# Allegro board SDI-12_HUMIDITY_ SENSOR_SCH_REVA_20190406.brd
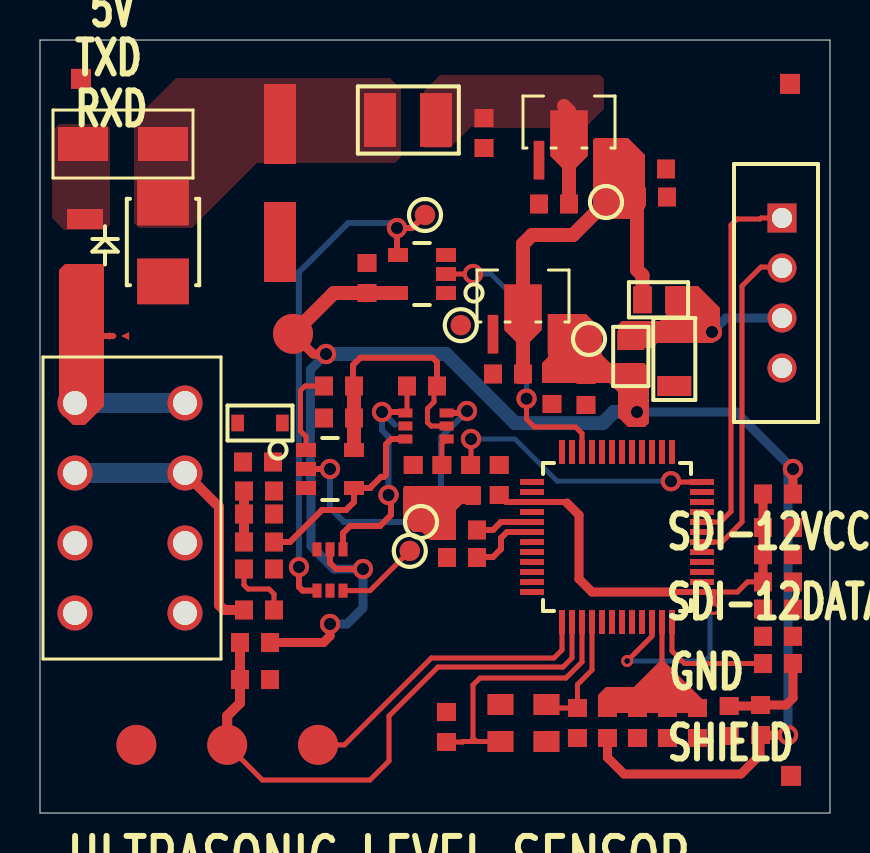
[diagram p0: board, top side]
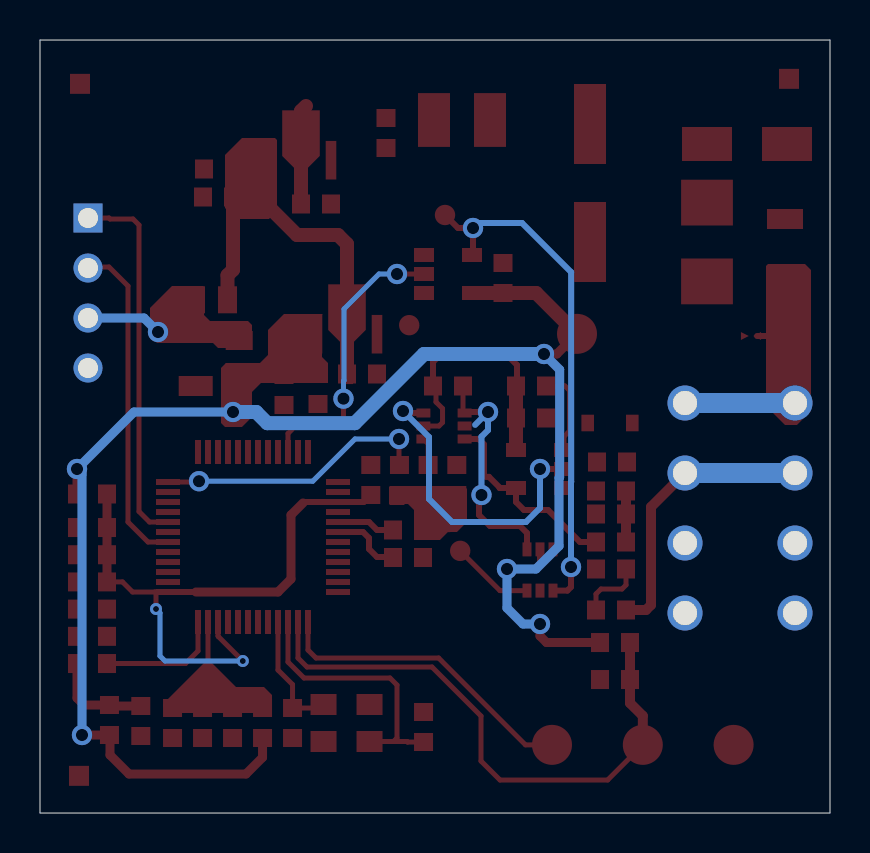
[diagram p1: board, bottom side, seen from below]

Outline 39.5 x 38.65 mm; copper layers: TOP, BOTTOM. Coordinates in mm from the lower left corner of the outline.
Outline path: 0,38.65 0,0 39.5,0 39.5,38.65 0,38.65

## Design rules (mm)
net group POWER: nets VCC_3V3

## Placement (name value [footprint] x y rotation side)
C1  0.1uF  [CC0603]  22.96 16.65 90 top
C2  0.1uF  [CC0603]  10.75 6.67 0 top
C3  9.0pF  [CC0603]  20.32 4.3 270 top
C4  9.0pF  [CC0603]  26.87 4.5 90 top
C5  1uF  [CC0603]  36.9 14.27 0 top
C6  0.1uF  [CC0603]  36.9 12.91 0 top
C7  1nF  [CC0603]  36.9 11.55 0 top
C8  1uF  [CC0603]  31.37 4.5 90 top
C9  10uF  [CC0603]  29.87 4.5 270 top
C10  0.1uF  [CC0603]  32.87 4.5 270 top
C11  1uF  [CC0603]  34.46 4.6 90 top
C12  10uF  [CC0603]  36.9 10.19 0 top
C13  0.1uF  [CC0603]  36.9 8.83 0 top
C14  10UF/50V  [CAPAE630W660H570]  12 31.5 270 top
C15  1uF/50V  [CC0603]  25.7 30.45 180 top
C16  0.1uF  [CC0603]  22.2 34 270 top
C17  10uF  [CC0603]  30.6 30.8 0 top
C18  0.1uF  [CC0603]  30.55 32.2 0 top
C19  1uF  [CC0603]  23.4 21.95 180 top
C20  10uF  [CC0603]  27.3 21.15 270 top
C21  0.1uF  [CC0603]  25.6 21.2 270 top
C22  0.1uF  [CC0603]  16.35 26.75 90 top
C23  0.1uF  [CC0603]  14.95 19.75 180 top
C24  3.3nF  [CC0603]  10.95 16.1 180 top
C25  100uF  [CAPT1206]  31.71 22.7 270 top
CON1  B4B-EH(LF)(SN)  [CON_B4B-EH-A]  36.8 26 270 top
CON2  1825660000  [LSF-SMT_8L]  5.25 15.25 270 top
D1  B350A-13-F  [DO-214AC]  4.15 33.45 0 top
D2  PDZ7.5B  [DIOSOD323]  11 19.5 0 top
F1  1206L012WR  [FUSER_1206L012WR]  2.25 28.3 90 top
FIDUCIAL1  TP100  [FIDS100XS200]  2.05 36.71 0 top
FIDUCIAL2  TP100  [FIDS100XS200]  37.55 1.86 0 top
FIDUCIAL3  TP100  [FIDS100XS200]  37.5 36.46 0 top
L1  MMZ1608R601A  [INDC0603]  36.9 15.95 0 top
L2  MMZ1608R601A  [INDC0603]  28.37 4.5 270 top
L3  MMZ1608R601A  [INDC0603]  36.03 4.65 270 top
L4  1uH  [INDC1210H87]  18.4 34.65 0 top
NOREF  -  []  -232.85 -203.15 0 top
R1  4.7k  [RC0603]  10.75 8.52 180 top
R2  33R  [RC0603]  36.9 7.47 180 top
R3  330k  [RC0603]  14.95 21.35 0 top
R4  330k  [RC0603]  19.1 21.35 0 top
R5  510R  [RC0603]  10.95 13.55 0 top
R6  68R  [RC0603]  10.95 14.95 180 top
R7  220R  [RC0603]  10.95 12.2 0 top
R8  220R  [RC0603]  10.95 10.15 0 top
R9  200k  [RC0603]  10.9 17.55 180 top
R10  120k  [RC0603]  20.09 16.65 270 top
R11  180k  [RC0603]  18.66 16.65 270 top
R12  DNP_0R  [RC0805]  30.93 25.66 180 top
R13  0R  [RC0805]  29.54 22.82 270 top
R14  0R  [RC0603]  21.1 12.77 180 top
R15  0R  [RC0603]  21.1 14.15 180 top
R16  0R  [RC0603]  21.53 16.65 270 top
TP1  -  [TP100]  18.49 13.11 0 top
TP2  -  [TP100]  19.05 14.55 180 top
TP3  T POINT R  [TP_80C]  12.65 23.96 0 top
TP4  T POINT R  [TP_80C]  13.9 3.41 0 top
TP5  T POINT R  [TP_80C]  4.82 3.41 0 top
TP6  T POINT R  [TP_80C]  9.36 3.41 0 top
TP7  -  [TP100]  28.3 30.55 0 top
TP8  -  [TP100]  27.45 23.7 0 top
TP9  -  [TP100]  21.04 24.39 0 top
TP10  -  [TP100]  19.25 29.9 180 top
U1  STM8L151C6T6  [QFP50P900X900-48]  28.85 13.8 0 top
U2  MCP1703T-5002E/MB  [SOT89]  26.45 34.55 0 top
U3  MCP1703T-3302E/MB  [SOT89]  24.15 25.85 0 top
U4  NC7SZ14M5  [SOT23-5]  19.1 26.95 90 top
U5  74LVC2G07GW  [SOT363-6]  14.5 12.15 90 top
U6  NC7WZ14P6X  [TSSOP65P-6]  19.3 19.35 0 top
U7  NC7SZ125M5  [SOT23-5]  14.5 17.2 270 top
V1  SPARK GAP  [SPARK_GAP]  3.95 23.85 0 top
VR1  SMBJ17A  [DIO_DO214AA_SMB]  6.15 28.55 90 top
Y1  CRYSTAL 16MHZ  [XTAL_CX3225SB16000E0FPZ25]  24.17 4.5 180 top

## Library data of the parts
C1-C13 C15-C24 = CAP
C14 C25 = CAPPOL
CON1 = CON_04
CON2 = CON8_LSF_SMT
D1 = DIODE_AK
D2 = DIO_SCHOTTKY_AK
F1 = FUSE
FIDUCIAL1-FIDUCIAL3 TP1 TP2 TP7-TP10 = TP
L1-L4 = INDUCTOR
R1 = res
R2-R16 = RES
TP3-TP6 = T POINT R
U1 = STM8L151C6T6_34
U2 = MCP1703T
U3 = IC_MCP1703T-3302E/MB
U4 = IC_NC7SZ14M5
U5 = IC_74LVC2G07GW
U6 = IC_NC7WZ14P6X
U7 = IC_NC7SZ125M5
V1 = SPARK GAP
VR1 = ZENER_AK
Y1 = CRYSTAL_old

## Footprints (pads in the part's own frame, mm; a bottom-side part is the same pattern mirrored in y, then rotated)
CAPAE630W660H570
  rect 4x1.6 smd: 1(-2.95,0) 2(2.95,0)
CAPT1206
  rect 1x1.7 smd: 1(-1.35,0) 2(1.35,0)
CC0603
  rect 0.9x0.95 smd: 1(-0.75,0) 2(0.75,0)
CON_B4B-EH-A
  rect 1.45x1.45 hole 1: 1(-3.75,0.3)
  round 1.45 hole 1: 2(-1.25,0.3) 3(1.25,0.3) 4(3.75,0.3)
DIO_DO214AA_SMB
  rect 2.29x2.59 smd: 1(-1.97,0) 2(1.97,0)
DIOSOD323
  rect 0.63x0.83 smd: 1(-1.115,0) 2(1.115,0)
DO-214AC
  rect 2.5x1.7 smd: 1(-2,0) 2(2,0)
FIDS100XS200
  rect 1x1 smd: 1(0,0)
FUSER_1206L012WR
  rect 1x1.8 smd: 1(-1.4,0) 2(1.4,0)
INDC0603
  rect 0.9x0.95 smd: 1(-0.75,0) 2(0.75,0)
INDC1210H87
  rect 1.6x2.69 smd: 1(-1.4,0) 2(1.4,0)
LSF-SMT_8L
  round 1.75 hole 1.2: 1(5.25,2) 2(1.75,2) 3(-1.75,2) 4(-5.25,2) 5(-5.25,-3.5) 6(-1.75,-3.5) 7(1.75,-3.5) 8(5.25,-3.5)
QFP50P900X900-48
  rect 0.3x1.2 smd: 1(-2.75,-4.25) 2(-2.25,-4.25) 3(-1.75,-4.25) 4(-1.25,-4.25) 5(-0.75,-4.25) 6(-0.25,-4.25) 7(0.25,-4.25) 8(0.75,-4.25) 9(1.25,-4.25) 10(1.75,-4.25) 11(2.25,-4.25) 12(2.75,-4.25) 25(2.75,4.25) 26(2.25,4.25) 27(1.75,4.25) 28(1.25,4.25) 29(0.75,4.25) 30(0.25,4.25) 31(-0.25,4.25) 32(-0.75,4.25) 33(-1.25,4.25) 34(-1.75,4.25) 35(-2.25,4.25) 36(-2.75,4.25)
  rect 1.2x0.3 smd: 13(4.25,-2.75) 14(4.25,-2.25) 15(4.25,-1.75) 16(4.25,-1.25) 17(4.25,-0.75) 18(4.25,-0.25) 19(4.25,0.25) 20(4.25,0.75) 21(4.25,1.25) 22(4.25,1.75) 23(4.25,2.25) 24(4.25,2.75) 37(-4.25,2.75) 38(-4.25,2.25) 39(-4.25,1.75) 40(-4.25,1.25) 41(-4.25,0.75) 42(-4.25,0.25) 43(-4.25,-0.25) 44(-4.25,-0.75) 45(-4.25,-1.25) 46(-4.25,-1.75) 47(-4.25,-2.25) 48(-4.25,-2.75)
RC0603
  rect 0.9x0.95 smd: 1(-0.75,0) 2(0.75,0)
RC0805
  rect 0.95x1.35 smd: 1(-0.8,0) 2(0.8,0)
SOT23-5
  rect 0.7x1 smd: 1(-0.95,-1.2) 2(0,-1.2) 3(0.95,-1.2) 4(0.95,1.2) 5(-0.95,1.2)
SOT89
  rect 0.53x1.93 smd: 1(-1.5,-1.91) 3(1.5,-1.91)
  custom 1.88x4.985 smd: 2(0,-1.91)
SOT363-6
  rect 0.7x0.45 smd: 1(-1.03,0.65) 2(-1.03,0) 3(-1.03,-0.65) 4(1.03,-0.65) 5(1.03,0) 6(1.03,0.65)
SPARK_GAP
  custom 0.4x0.4 smd: 1(-0.305,0) 2(0.305,0)
TP100
  round 1.02 smd: 1(0,0)
TP_80C
  round 2 smd: 1(0,0)
TSSOP65P-6
  rect 0.7x0.45 smd: 1(-1.03,0.65) 2(-1.03,0) 3(-1.03,-0.65) 4(1.03,-0.65) 5(1.03,0) 6(1.03,0.65)
XTAL_CX3225SB16000E0FPZ25
  rect 1.3x1.05 smd: 1(-1.15,-0.925) 2(1.15,-0.925) 3(1.15,0.925) 4(-1.15,0.925)

## Nets
GND: C1.2 C2.2 C3.1 C4.1 C5.2 C6.2 C7.2 C8.1 C9.2 C10.2 C11.1 C12.2 C13.2 C14.2(N) C15.2 C16.2 C17.2 C18.2 C19.2 C20.2 C21.2 C22.2 C23.2 C24.1 C25.2(N) CON1.4 CON2.1(SHIELD1) CON2.2(GND1) CON2.7(GND2) CON2.8(SHIELD2) D2.2(ANODE) R9.1(2) R11.1(2) TP5.1(TP) TP9.1 U1.9(VSS) U1.40(VSSIO) U2.1(GND) U3.1(GND) U4.3(GND) U5.2(GND) U6.2(GND) U7.3(GND) V1.2 VR1.1(ANODE) Y1.2 Y1.4
VCC_3V3: C20.1 C21.1 C22.1 L1.2 L2.2 L3.2 R1.1(2) R13.2(1) TP3.1(TP) TP8.1 U3.3(VOUT) U4.5(VCC) U5.5(VCC)
VCC_5V: C17.1 C18.1 C19.1 C23.1 R3.2(1) R4.2(1) R12.2(1) TP7.1 U2.3(VOUT) U3.2(VIN_1) U6.5(VCC) U7.5(VCC)
VDD: C1.1 C5.1 C6.1 C7.1 L1.1 U1.10(VDD) U1.13(RES) U1.39(VDDIO)
/SDI_TXD_EN: U1.34(PD5) U4.2(A)
NRESET: C2.1 R1.2(1) TP6.1(TP) U1.2(PA1)
RXD: CON1.1 U1.20(PD0)
SDI_RXD: R10.2(1) R11.2(1) R15.2(1) R16.2(1) TP2.1
SDI_TXD: R14.2(1) TP1.1 U5.3(2A)
SWIM: TP4.1(TP) U1.1(PA0)
TXD: CON1.2 U1.18(PE4)
V_IN_12V: CON2.4(POWER1) CON2.5(POWER2) F1.1 V1.1
N18460657: C12.1 C13.1 R2.2(1) U1.12(VREF)
N18460681: C8.2 C9.1 C10.1 L2.1 U1.11(VDDA)
N18460696: C3.2 U1.3(PA2) Y1.3
N18460698: C4.2 U1.4(PA3) Y1.1
N18460743: C11.2 L3.1 R2.1(2)
N18464009: CON2.3(DATA1) CON2.6(DATA2) R8.1(2)
N18466602: C25.1(P) CON1.3 R12.1(2) R13.1(2)
N18468051: R14.1(2) U1.42(PC3)
N18468081: R15.1(2) U1.41(PC2)
N18468199: R16.1(2) U1.24(PB0)
N19333552: R7.1(2) R8.2(1)
N19333554: R6.1(2) R7.2(1)
N19333556: C24.2 D2.1(CATHODE) R5.1(2) R6.2(1) R9.2(1)
N19333579: R10.1(2) U6.4(/Y2)
N19333581: R5.2(1) U6.3(A2) U7.4(Y)
N19333595: TP10.1 U4.4(/Y) U5.1(1A)
N19334013: R3.1(2) U5.6(1Y) U7.1(NOE)
N19334015: R4.1(2) U5.4(2Y) U6.1(A1)
N19334077: U6.6(/Y1) U7.2(A)
N19334098: C15.1 C16.1 L4.2 U2.2(VIN_1)
N19334148: D1.1(A) F1.2
N19334157: C14.1(P) D1.2(K) L4.1 VR1.2(CATHODE)

Pads without a net: FIDUCIAL1 1; FIDUCIAL2 1; FIDUCIAL3 1; U1 5 6 7 8 14 15 16 17 19 21 22 23 25 26 27 28 29 30 31 32 33 35 36 37 38 43 44 45 46 47 48; U4 1

## Via types
v1: diameter 1.016, hole 0.61, TOP to BOTTOM, 17 vias
v2: diameter 0.6, hole 0.3, TOP to BOTTOM, 2 vias

## Routing (per net, layer and track width the routed paths; a pad name or vN(x,y) marks a point on that pad's centre or on a via; arc(x,y) is an arc through that point)
VCC_3V3: length 86
  TOP w0.3: v1(16.15,12.2) 14.8,12.2 14.5,12.5 U5.5
  TOP w0.45: v1(29.85,20.05) 29.54,20.36 R13.2 ; R1.1 14.17,8.52 14.5,8.85 v1(14.5,9.45) ; L2.2 28.37,2.77 29.2,1.95 35.05,1.95 36,2.9 36,3.87 L3.2 v1(37.4,3.9) ; TP3.1 13.66,22.95 v1(14.3,22.95) ; v1(37.65,17.2) L1.2
  TOP w0.7: U4.5 C22.1 14.69,26 TP3.1
  BOTTOM w0.45: v1(29.85,20.05) 34.8,20.05 v1(37.65,17.2) 37.4,16.95 v1(37.4,3.9) ; v1(14.5,9.45) 15.35,9.45 16.15,10.25 v1(16.15,12.2) 14.7,12.2 13.55,13.35 13.55,16.76 13.52,16.79 13.52,22.17 v1(14.3,22.95)
  BOTTOM w0.7: v1(14.3,22.95) 20.3,22.95 23.76,19.49 28.13,19.49 28.69,20.05 v1(29.85,20.05)
VCC_5V: length 29.7
  TOP w0.25: U6.5 19.55,19.35 19.37,19.53 19.37,20.22 19.7,20.55 19.7,21.2 R4.2
  TOP w0.3: R4.2 19.85,22.55 19.64,22.76 16.01,22.76 15.65,22.4 15.65,21.4 R3.2
  TOP w0.7: R12.2 30.13,26.89 29.85,27.16 C17.1 ; R3.2 C23.1 U7.5 ; TP7.1 26.65,28.9 24.6,28.9 24.15,28.45 U3.2 C19.1
VDD: length 31.7
  TOP w0.25: v2(29.36,7.6) 30.57,8.82 30.57,8.82 30.6,8.85 U1.10 ; C7.1 35.38,11.55 34.87,11.05 33.75,11.05 ; 33.1,11.05 U1.13 33.75,11.05 ; 33.75,11.05 33.7,11 v2(33.7,10.2)
  TOP w0.3: U1.13 31.7,11.05 ; C1.1 23.31,15.55 U1.39 26.3,15.55 26.35,15.5
  TOP w0.45: 31.7,11.05 27.6,11.05 26.95,11.7 26.95,14.9 26.35,15.5 ; L1.1 C5.1 C6.1 C7.1
  BOTTOM w0.25: v2(29.36,7.6) 33.25,7.6 33.5,7.85 33.5,10 v2(33.7,10.2)
/SDI_TXD_EN: length 14.2
  TOP w0.25: U1.34 27.1,18.97 26.78,19.3 24.72,19.3 24.33,19.69 v1(24.33,20.72) ; v1(21.65,26.95) U4.2
  BOTTOM w0.25: v1(21.65,26.95) 22.55,26.95 24.3,25.2 24.3,21.63 24.33,21.6 v1(24.33,20.72)
NRESET: length 29
  TOP w0.25: U1.2 26.6,7.75 26.15,7.3 19.9,7.3 17.45,4.85 17.45,2.6 16.5,1.65 11.12,1.65 TP6.1
  TOP w0.5: TP6.1 9.36,4.86 10,5.5 C2.1 R1.2
RXD: length 18.7
  TOP w0.25: CON1.1 36.05,29.75 36,29.7 34.85,29.7 34.55,29.4 34.55,15.07 34.02,14.55 U1.20
SDI_TXD: length 4.2
  TOP w0.25: TP1.1 16.5,11.12 U5.3
SWIM: length 15.6
  TOP w0.25: TP4.1 15.23,3.41 19.57,7.75 25.7,7.75 26.1,8.15 U1.1
TXD: length 16.6
  TOP w0.25: CON1.2 37.05,27.3 36.05,27.3 35.1,26.35 35.1,14.55 34.1,13.55 U1.18
V_IN_12V: length 6.3
  TOP w0.3: 2.9,23.9 2.95,23.85 3.64,23.85
  BOTTOM w1: CON2.4 CON2.5
N18460657: length 6.3
  TOP w0.25: U1.12 31.6,8.1 32.23,7.47 R2.2
N18460681: length 7.1
  TOP w0.25: 31.2,7 31.1,7.1 U1.11
  TOP w0.5: C10.1 C8.2 C9.1 L2.1
N18460696: length 13.6
  TOP w0.25: U1.3 27.1,7.55 26.3,6.75 22,6.75 21.65,6.4 21.65,3.75 21.82,3.57 ; C3.2 21.12,3.55 21.15,3.57 21.82,3.57 ; 21.82,3.57 Y1.3 22.95,3.5
N18460698: length 6.2
  TOP w0.25: Y1.1 25.5,5.25 C4.2 26.87,6.42 27.6,7.15 U1.4
N18460743: length 5.1
  TOP w0.45: R2.1 37.65,5.75 37.3,5.4 L3.1 35.98,5.35 C11.2
N18464009: length 14.2
  TOP w0.5: CON2.3 8.95,15.3 8.95,10.4 9.2,10.15 R8.1
  BOTTOM w1: CON2.3 CON2.6
N18466602: length 9.6
  TOP w0.45: R13.1 29.63,23.62 29.95,23.95 31.61,23.95 C25.1 ; C25.1 v1(33.6,24.05) ; C25.1 31.71,25.65 R12.1
  BOTTOM w0.45: CON1.3 34.3,24.75 v1(33.6,24.05)
N18468051: length 3.6
  TOP w0.3: U1.42 23.35,14.05 23.05,13.75 23.05,13.2 22.65,12.8 21.88,12.8 R14.1
N18468081: length 2.9
  TOP w0.3: R15.1 22.65,14.15 23.05,14.55 U1.41
N18468199: length 13.8
  TOP w0.25: U1.24 31.85,16.55 31.85,16.59 v1(31.55,16.59) ; R16.1 21.55,17.42 v1(21.55,18.7)
  BOTTOM w0.25: v1(31.55,16.59) 25.86,16.59 23.75,18.7 v1(21.55,18.7)
N19333552: length 3.3
  TOP w0.25: R7.1 10.2,11.4 10.4,11.2 11.45,11.2 11.7,10.95 R8.2
N19333556: length 2.5
  TOP w0.5: R5.1 R6.2 C24.2
N19333579: length 1.4
  TOP w0.25: R10.1 20.09,18.46 U6.4
N19333581: length 10
  TOP w0.3: U6.3 17.57,18.7 17.3,18.43 17.3,16.9 17.21,16.81 17.05,16.81 16.52,16.28 16.52,16.25 U7.4 15.7,15.55 15.3,15.15 14.1,15.15 12.5,13.55 R5.2
N19333595: length 25.8
  TOP w0.3: U5.1 13.13,11.12 12.95,11.3 v1(12.95,12.3) ; TP10.1 18.6,29.25 v1(17.85,29.25) 17.85,27.95 U4.4
  BOTTOM w0.3: v1(12.95,12.3) 12.95,16.55 12.94,16.55 12.94,27.04 15.4,29.5 17.6,29.5 v1(17.85,29.25)
N19334013: length 4.5
  TOP w0.25: R3.1 14.1,21.45 ; 14.1,21.45 14.07,21.48 ; 14.1,21.45 14,21.35 13.25,21.35 13.02,21.12 13.02,19.1 13.3,18.82 U7.1
N19334015: length 12.5
  TOP w0.25: R4.1 18.35,20.08 U6.1
  TOP w0.3: v1(17.43,15.9) 17.55,15.9 17.55,14.9 17,14.35 15.5,14.35 15.15,14 U5.4 ; v1(17.1,20.05) 18.22,20.05 U6.1
  BOTTOM w0.3: v1(17.43,15.9) 17.43,18.82 17.1,19.14 v1(17.1,20.05) 17.74,19.41
N19334077: length 15.5
  TOP w0.3: U7.2 v1(14.5,17.2) ; U6.6 21.25,20 v1(21.35,20.1)
  BOTTOM w0.3: v1(14.5,17.2) 14.5,15.25 15.2,14.55 18.9,14.55 20.05,15.7 20.05,18.8 v1(21.35,20.1)
N19334098: length 5
  TOP w0.7: C15.1 U2.2 26.45,35.1 26.2,35.35

## Copper pours and planes (outline as drawn; the poured copper is in the pictures)
VCC_3V3 on TOP (solid shape): 28.1,24.15 28.1,22.9 28.5,22.5 30.2,22.5 30.45,22.25 30.45,19.5 30.25,19.3 29.4,19.3 28.9,19.8 28.9,21.05 28.45,21.5 25.1,21.5 25.1,22.5 25.4,22.8 25.4,24.9 25.35,24.95 27.3,24.95
VCC_5V on TOP (solid shape): 30.25,32.9 30.25,30.25 29.7,29.7 28.05,29.7 27.65,30.1 27.65,33.65 27.75,33.75 29.4,33.75
SDI_RXD on TOP (solid shape): 22.05,16.3 22.05,15.45 22,15.4 21.3,15.4 21.2,15.5 21.15,15.5 20.8,15.15 20.8,13.65 19.5,13.65 19.1,14.05 18.65,14.05 18.15,14.55 18.15,16.2 18.3,16.35 22,16.35
V_IN_12V on TOP (solid shape): 3.2,27.35 3.2,20.35 2.25,19.4 1.65,19.4 0.95,20.1 0.95,27.15 1.25,27.45 3.1,27.45
N18460681 on TOP (solid shape): 33.35,5.45 33.35,5.3 33.1,5.05 28.25,5.05 27.9,5.4 27.9,5.9 28.3,6.3 29.7,6.3 31,7.6 31,7.65 31.15,7.65
N18466602 on TOP (solid shape): 34,25.25 34,23.85 33.65,23.5 30.85,23.5 30.6,23.25 28.9,23.25 28.9,24.4 29.1,24.6 31,24.6 31.3,24.9 31.3,26.3 31.35,26.35 32.9,26.35
N19334098 on TOP: 19.2,33.25 19.2,36.1 20,36.9 28,36.9 28.2,36.7 28.2,35.2 27.25,34.25 21.7,34.25 21.6,34.35 20.5,33.25
N19334148 on TOP: 3.25,29.15 1.2,29.15 0.6,29.75 0.6,34.1 0.95,34.45 3.3,34.45 3.5,34.25 3.5,29.4
N19334157 on TOP: 7.6,29.25 4.95,29.25 4.7,29.5 4.7,34.65 6.8,36.75 17.5,36.75 18,36.25 18.05,36.25 18.05,32.8 17.75,32.5 10.85,32.5

## Text on the board
User.Comments: GND | TXD | RXD | 5V | SDI-12_ULTRASONIC LEVEL SENSOR | REV B | SDI-12DATA | SDI-12VCC | SHIELD
Ref Des/Silkscreen Top: GND | TXD | RXD | 5V | SDI-12DATA | SDI-12VCC | SHIELD | ULTRASONIC LEVEL SENSOR | REV A
PAGE_OUTLINE: DIMENSIONS IN MM | B | PCB RevB | SDI-12_ULTRASONIC LEVEL SENSOR | 20170515
DISPLAY_TOP: SECONDARY SIDE LAYER4 (18Um) | CORE              (1600Um) | PRIMARY SIDE LAYER1 (18Um) | 10.ALL BOARDS MUST BE ELECTRICALLY TESTED | 6.100% CONTINUTY TESTING USING DATABASE NETLIST SHALL BE | 7.LOGO AND DATEMARK NEGATIVE IN SOLDER MASK | 8.BOW AND TWIST | 9.MINIMUM CONDUCTER WIDTH IS 0.2MM | 5.SILK SCREEN LEGEND WILL NOT TO BE APPLIED. | SHALL NOT EXCEED 0.7% OF LONGEST SIDE. | 4. | 3.SURFACE FINISH:  LEAD FREE HAL | 1.FABRICATE PER IPC-6012A CLASS2 | 2.MATERIAL | SOLDER MASK MATERIAL SHALL MEET ALL REQUIREMENTS OF | COPPER. | PERFORMED. | IPC-SM-840C AND SHALL BE GREEN IN COLOR AND APPLIED OVER BASE | MINIMUM SPACING IS 0.15MM. | NOTES:UNLESS OTHERWISE SPECIFIED. | COPPER AS PER STACKUP | DIELECTRIC:FR4 PER IPC-4101 | UL.RATING | 94-0 MINIMUM | 1.6MM+/-10%
User.6: FILM LAYER: | PART NO/CARD REF:   LEVEL SENSOR | DAY :       15/05/2017 | RevB
User.8: SILKSCREEN-TOP
User.9: SOLDER MASK SECONDARY
User.10: SOLDER MASK PRIMARY
User.11: PASTEMASK BOTTOM
User.12: PRIMARY SIDE PASTEMASK
User.13: FABRICATION LAYER
User.14: PRIMARY SIDE
User.15: LAYER2-UNUSED1
User.16: LAYER2-SIGNAL1
User.17: LAYER3-SIGNL2
User.18: LAYER5-UNUSED2
User.19: SECONDARY SIDE
User.20: ASSEMBLY PRIMARY SIDE
User.21: ASSEMBLY SECONDARY SIDE
User.28: FIGURE | SIZE | 0.3 | 1.0 | 1.2 | 4.5 | DRILL CHART: TOP to BOTTOM | ALL UNITS ARE IN MILLIMETERS | TOLERANCE | +0.0/-0.0 | +0.08/-0.08 | PLATED | NON-PLATED | QTY | 511 | 4 | 8
